# Altium PCB mycam.PcbDoc
Units mm, origin at the board's own origin, x right, y up, seen from the top; angles counter-clockwise.
Board outline 40 x 40 mm, 2 copper layers (Top Layer, Bottom Layer); 59 components, 70 nets, 331 pads, 69 vias.
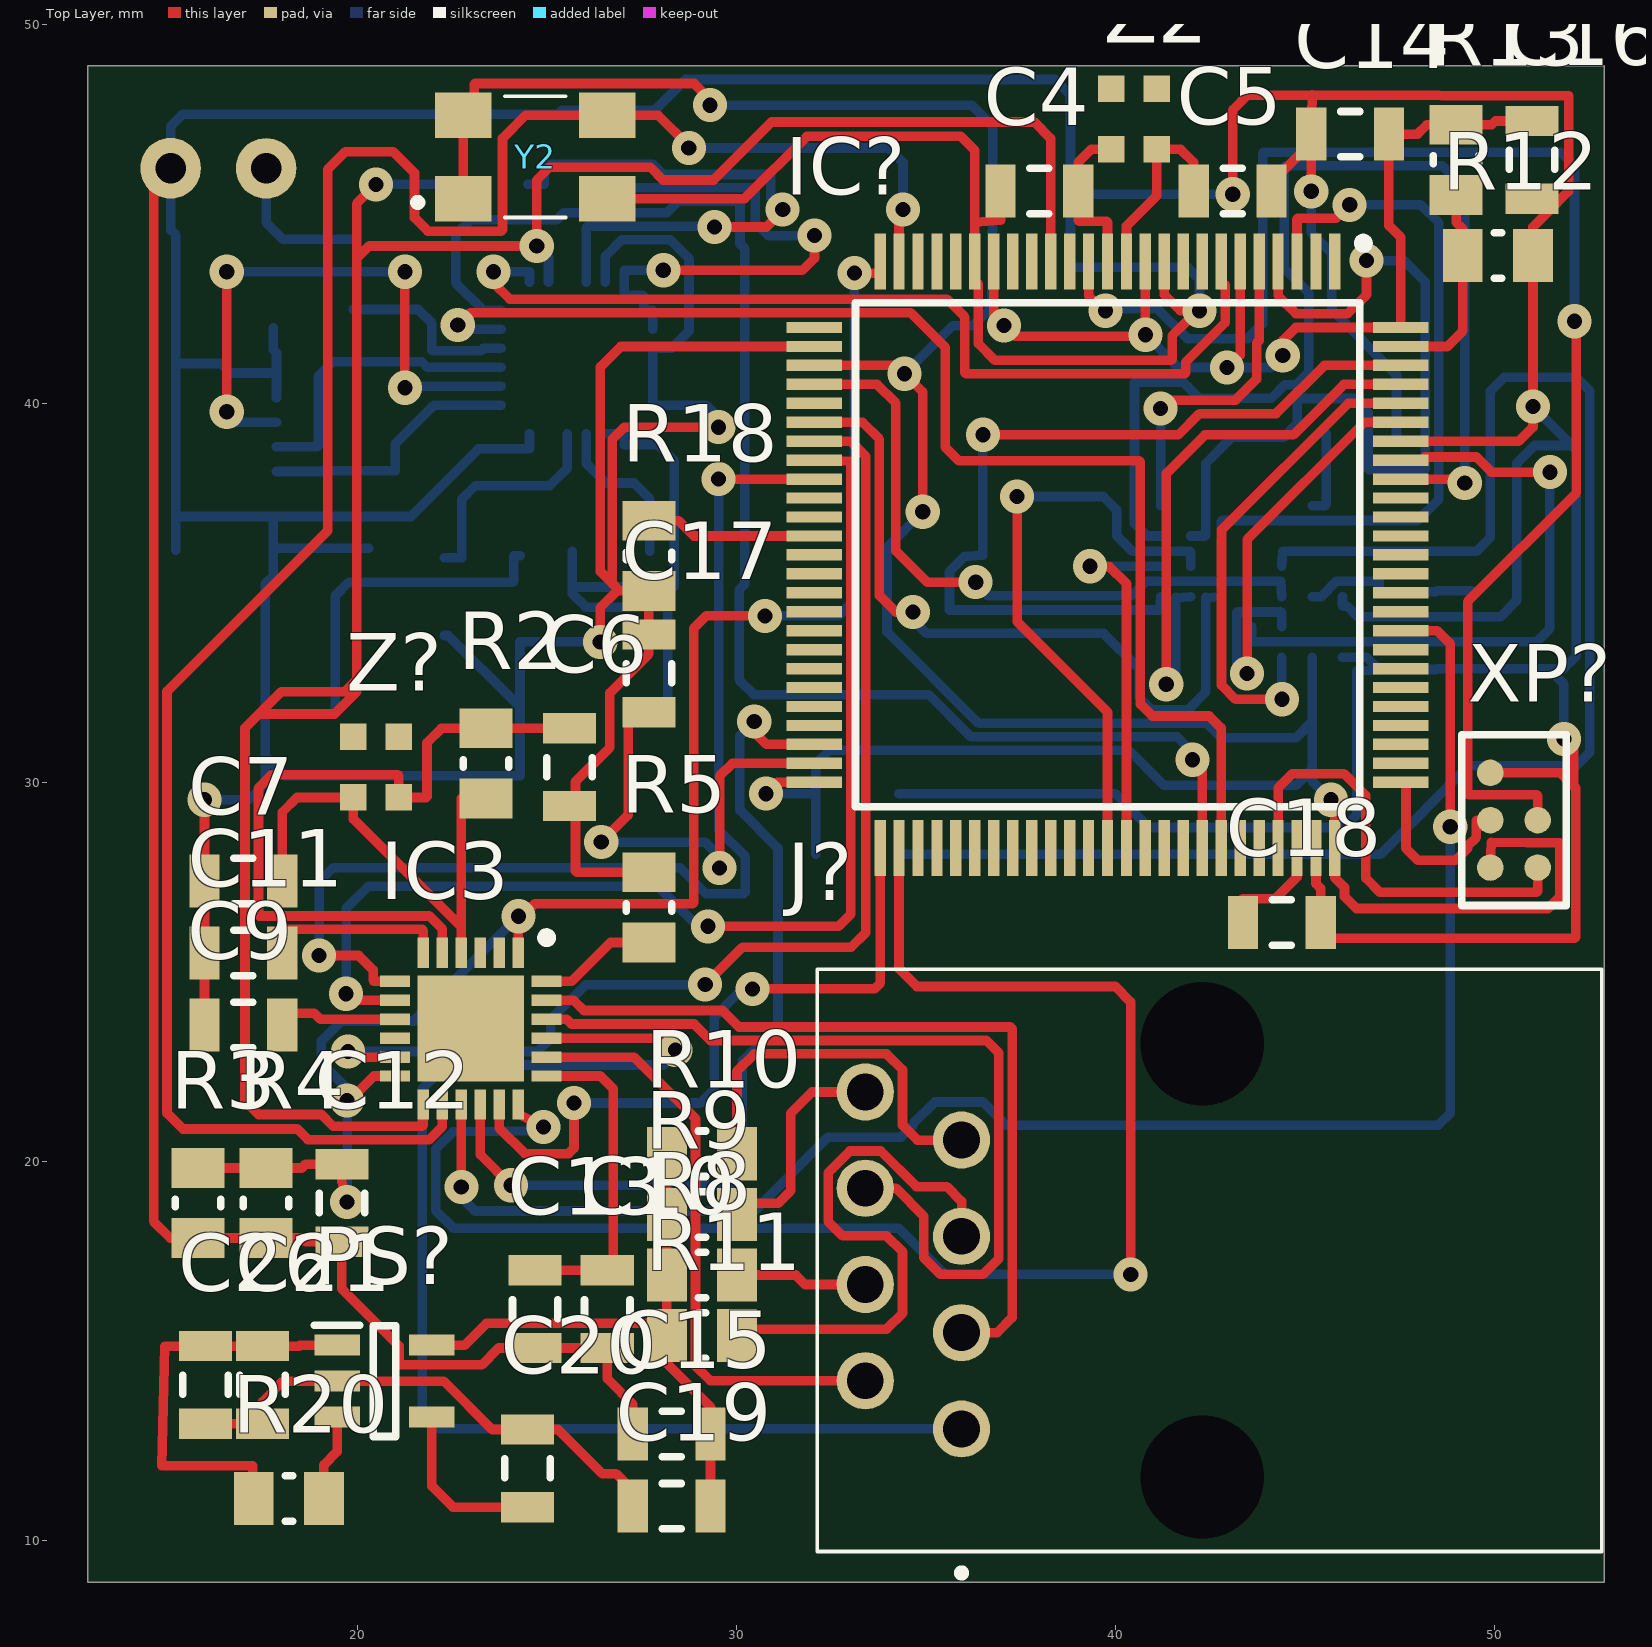
[diagram p0: Top Layer view]
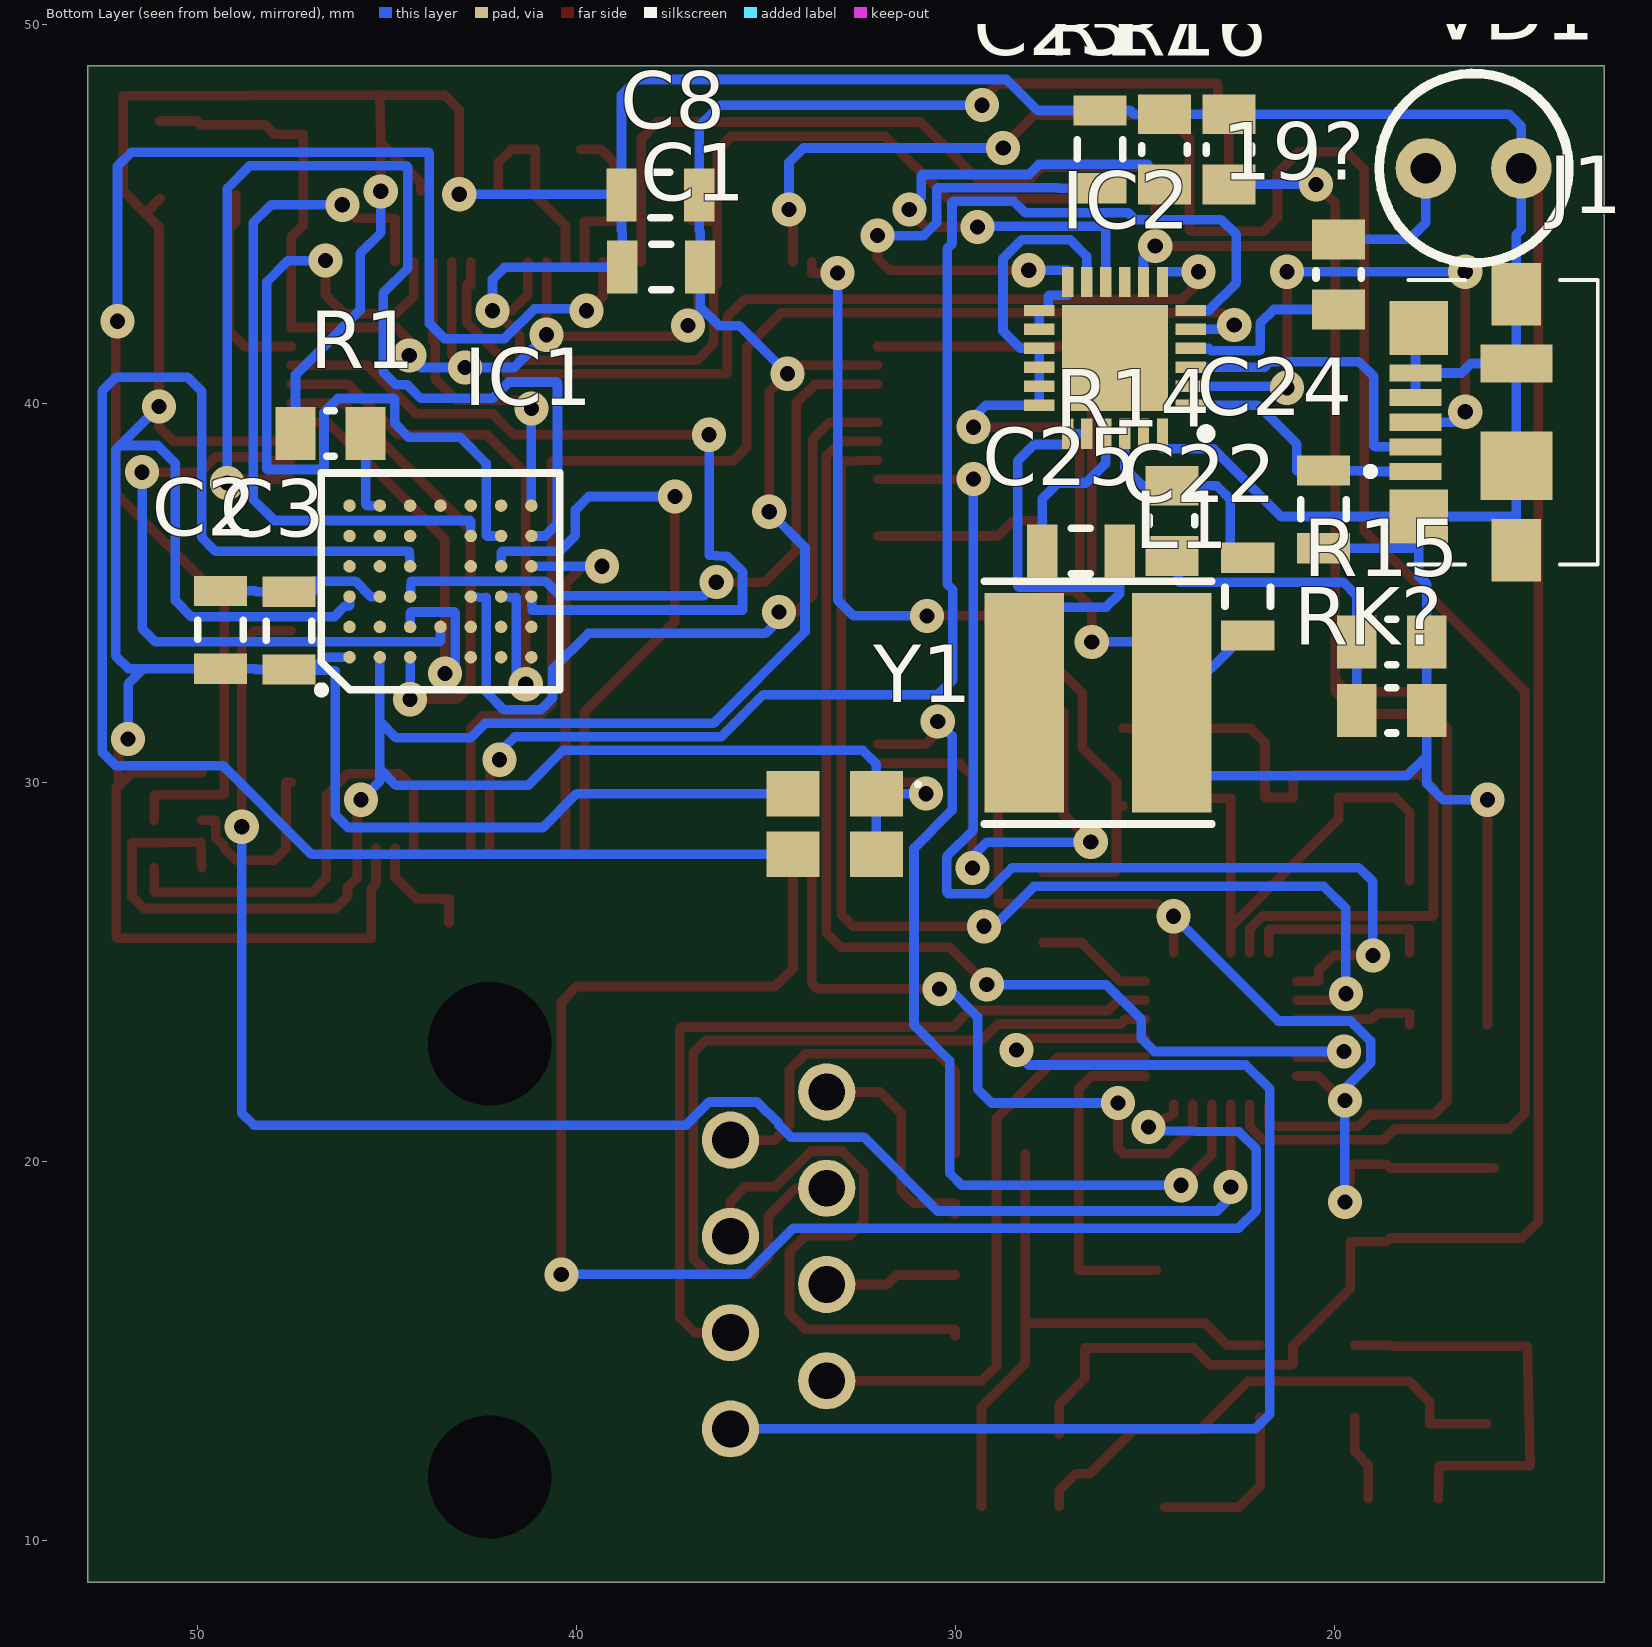
[diagram p1: Bottom Layer view, seen from below]
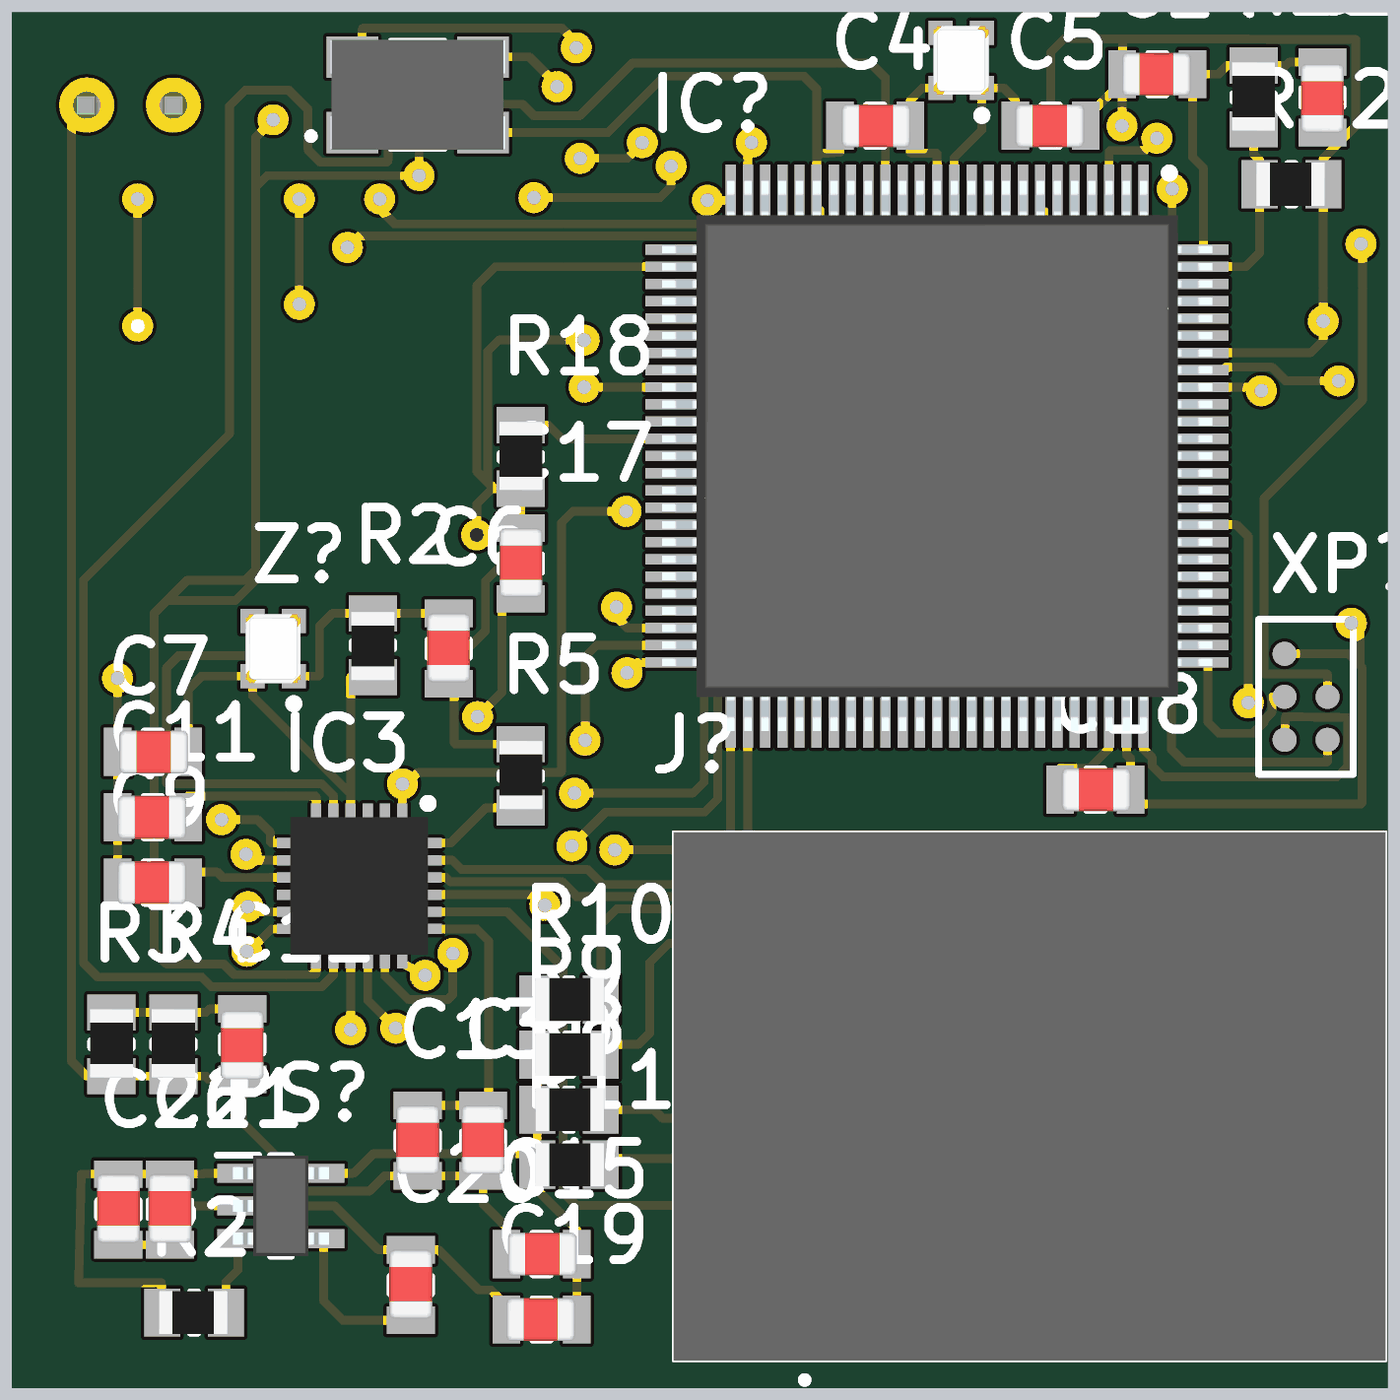
[diagram p2: 3D render of the assembled board from above, using the file's embedded part models]
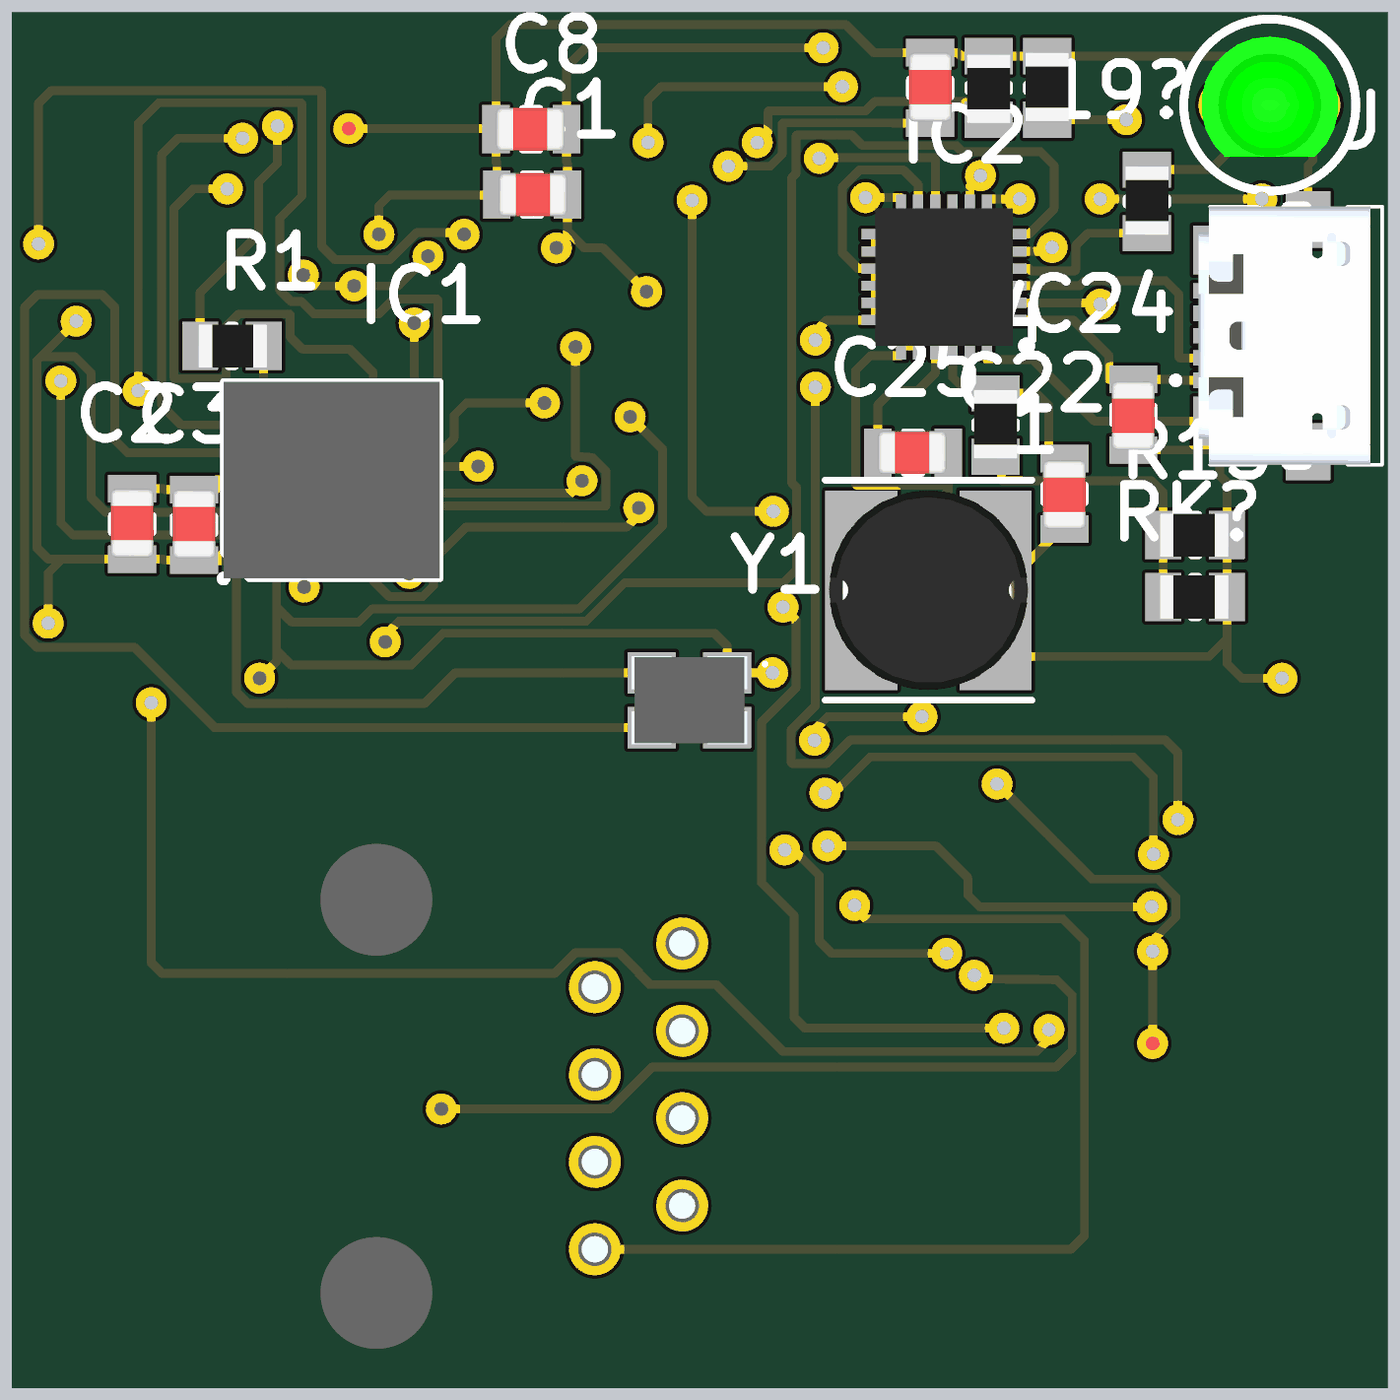
[diagram p3: 3D render of the assembled board from below, using the file's embedded part models]

## Layer stack, top to bottom
Top Solder: solder mask 0.0102, Solder Resist, Dk 3.5
Top Layer: signal copper 0.0356
Dielectric 1: dielectric 0.32, FR-4, Dk 4.8
Bottom Layer: signal copper 0.0356
Bottom Solder: solder mask 0.0102, Solder Resist, Dk 3.5

## Board outline
52.9,8.9 12.9,8.9 12.9,48.9 52.9,48.9

## Design rules (kind name [scope] priority, off if disabled: settings)
Clearance [All] p1: gap=0.1 ignorepadtopadclearanceinfootprint=FALSE
ComponentClearance [All] p1: gap=0.1 collisioncheckmode=3 verticalgap=1 showdistances=FALSE
HoleSize [All] p1: absolutevalues=TRUE maxlimit=3.5 minlimit=0.4 maxpercent=80.000 minpercent=20.000
MinimumSolderMaskSliver [All] p1: minsoldermaskwidth=0.1
PolygonConnect [All] p1: connectstyle=Relief reliefconductorwidth=0.3 reliefentries=4 polygonreliefangle="90 Angle" airgapwidth=0.25
RoutingVias [All] p1: holewidth=0.4 width=0.9 viastyle="Through Hole" minholewidth=0.4 minwidth=0.9 maxholewidth=0.4 maxwidth=0.9
SilkToSolderMaskClearance [IsPad] p1: minsilkscreentomaskgap=0.2 clearancetoexposedcopper=TRUE
SolderMaskExpansion [All] p1: expansion=0.1
Width [All] p1: maxlimit=0.8 minlimit=0.2 preferedwidth=0.254
26 further rules are at their usual default settings.

## Components (designator, comment, footprint, x,y, rotation, side; value= is the part's Value field where it differs from the comment)
19? "" "0805 (Resistor)" 19.9,43.4 r90 bottom
C1 "" "0805 (Capacitor)" 37.775,43.6 r180 bottom
C2 "" "0805 (Capacitor)" 49.4,34.025 r90 bottom
C3 "" "0805 (Capacitor)" 47.6,34 r90 bottom
C4 "" "0805 (Capacitor)" 38,45.6 r0 top
C5 "" "0805 (Capacitor)" 43.1,45.6 r180 top
C6 "" "0805 (Capacitor)" 25.6,30.4 r90 top
C7 "" "0805 (Capacitor)" 17,27.4 r0 top
C8 "" "0805 (Capacitor)" 37.8,45.5 r0 bottom
C9 "" "0805 (Capacitor)" 17,23.6 r180 top
C10 "" "0805 (Capacitor)" 26.6,16.1 r90 top
C11 "" "0805 (Capacitor)" 17,25.5 r180 top
C12 "" "0805 (Capacitor)" 19.6,18.9 r270 top
C13 "" "0805 (Capacitor)" 24.7,16.1 r90 top
C14 "" "0805 (Capacitor)" 46.2,47.1 r180 top
C15 "" "0805 (Capacitor)" 28.3,12.8 r0 top
C16 "" "0805 (Capacitor)" 51,46.425 r270 top
C17 "" "0805 (Capacitor)" 27.7,32.875 r90 top
C18 "" "0805 (Capacitor)" 44.4,26.3 r0 top
C19 "" "0805 (Capacitor)" 28.3,10.9 r180 top
C20 "" "0805 (Capacitor)" 24.5,11.9 r90 top
C21 "" "0805 (Capacitor)" 17.5,14.1 r90 top
C22 "" "0805 (Capacitor)" 22.3,34.9 r270 bottom
C23 "" "0805 (Capacitor)" 26.2,46.7 r90 bottom
C24 "" "0805 (Capacitor)" 20.3,37.2 r270 bottom
C25 "" "0805 (Capacitor)" 26.7,36.1 r0 bottom
C26 "" "0805 (Capacitor)" 16,14.1 r90 top
IC1 "OV9655(2640)" BGA38C80P6X7_572X628X96 43.6,35.3 r90 bottom
IC2 "BQ24295RGER" QFN50P400X400X100-25N-D 25.8,41.2 r0 bottom
IC3 "LAN8720ACP" QFN50P400X400X100-25N-D 23,23.5 r270 top
IC? "STM32F407VGT6" QFP50P1600X1600X160-100N 39.8,36 r270 top
J1 "0473461001" 0473461001 15.9,39.5 r90 bottom
J? "SS-6488-FLS" SS6488FLS 35.95,12.94 r90 top
L1 "Fixed inductor, , , 0603, 50mA, -55...+125°C" "IND: SDR0604" 26.25,32.1 r0 bottom
PS? "AP2202K-ADJTRG1" SOT95P280X145-5N 20.725,14.2 r0 top
R1 "" "0805 (Resistor)" 46.5,39.2 r180 bottom
R2 "" "0805 (Resistor)" 23.4,30.5 r270 top
R3 "" "0805 (Resistor)" 15.8,18.9 r90 top
R4 "" "0805 (Resistor)" 17.6,18.9 r90 top
R5 "" "0805 (Resistor)" 27.7,26.7 r90 top
R8 "" "0805 (Resistor)" 29.1,17 r0 top
R9 "" "0805 (Resistor)" 29.1,18.6 r0 top
R10 "" "0805 (Resistor)" 29.1,20.2 r0 top
R11 "" "0805 (Resistor)" 29.1,15.4 r0 top
R12 "" "0805 (Resistor)" 50.1,43.9 r180 top
R13 "" "0805 (Resistor)" 49,46.425 r90 top
R14 "" "0805 (Resistor)" 24.3,36.9 r90 bottom
R15 "" "0805 (Resistor)" 18.5,33.7 r0 bottom
R16 "" "0805 (Resistor)" 22.8,46.7 r90 bottom
R17 "" "0805 (Resistor)" 24.5,46.7 r270 bottom
R18 "" "0805 (Resistor)" 27.7,35.975 r90 top
R20 "" "0805 (Resistor)" 18.2,11.1 r180 top
RK? "" "0805 (Resistor)" 18.5,31.9 r0 bottom
VD1 "LED, Green, *, *, *, -55...+150°C" LED 18.33,44.202 r180 bottom
XP? "SWD" SWD 50.4,28.5 r90 top
Y1 "403C11A24M00000" 403C11A20M00000 33.2,28.9 r0 bottom
Y2 "405C11A25M00000" 405C11A25M00000 24.7,46.5 r0 top
Z2 "Crystal, , 6pF, ±50ppm, case 2016, -30...+85°C" "OSC: 2016" 40.5,47.5 r90 top
Z? "Crystal, , 6pF, ±50ppm, case 2016, -30...+85°C" "OSC: 2016" 20.5,30.4 r90 top

## Footprints (in the part's own frame and the unit in brackets; to place one, negate y for a bottom-side part, rotate by r counter-clockwise, add the part's x,y. Pads: shape width x height; smd on the part's side, far side on the other; paste and mask are expansions set on the pad)
403C11A20M00000 [mm]
  rect 1.4x1.2 smd: 1(-1.1,-0.8) 2(1.1,-0.8) 3(1.1,0.8) 4(-1.1,0.8)
  silkscreen extent -2.25,-1.1 -2.15,-1, body extent -1.68,-1.28 1.68,1.28, height 0.85
405C11A25M00000 [mm]
  rect 1.5x1.2 smd: 1(-1.9,-1.1) 2(1.9,-1.1) 3(1.9,1.1) 4(-1.9,1.1)
  silkscreen extent -3.2,-1.6 0.8,1.6, body extent -2.53,-1.6 2.53,1.6, height 1.1
"0805 (Capacitor)" [mm] "Chip Capacitor, 2-Leads, Body 2,00x1,25mm, IPC Medium Density"
  rect 0.8x1.4 smd: 1(-1.025,0) 2(1.025,0)
  silkscreen extent -0.25,-0.6 0.25,0.6, body extent -0.97,-0.62 1.03,0.63, height 0.78
"0805 (Resistor)" [mm] "Chip Resistor, 2-Leads, Body 2,10x1,30mm, IPC Medium Density"
  rect 1.05x1.4 smd: 1(-0.925,0) 2(0.925,0)
  silkscreen extent -0.1,-0.6 0.1,0.6, body extent -0.98,-0.63 1.02,0.62, height 0.5
0473461001 [mm]
  rect 0.45x1.38 smd: 1(-1.3,1.975) 2(-0.65,1.975) 3(0,1.975) 4(0.65,1.975) 5(1.3,1.975)
  rect 1.425x1.55 smd: MP1(-2.487,1.89) MP2(2.487,1.89)
  rect 1.65x1.3 smd: MP3(-3.375,-0.685) MP6(3.375,-0.685)
  rect 1.8x1.9 smd: MP4(-1.15,-0.685)
  rect 1x1.9 smd: MP5(1.55,-0.685)
  silkscreen extent -3.75,-2.83 3.75,3.26, body extent -3.9,-2.5 3.9,2.5, height 2.72
BGA38C80P6X7_572X628X96 [mm]
  round 0.33 smd: A1(-2,2.4) A2(-1.2,2.4) A3(-0.4,2.4) A4(0.4,2.4) A5(1.2,2.4) A6(2,2.4) B1(-2,1.6) B2(-1.2,1.6) B3(-0.4,1.6) B4(0.4,1.6) B5(1.2,1.6) B6(2,1.6) C1(-2,0.8) C2(-1.2,0.8) C3(-0.4,0.8) C4(0.4,0.8) C5(1.2,0.8) C6(2,0.8) D2(-1.2,0) D6(2,0) E1(-2,-0.8) E2(-1.2,-0.8) E3(-0.4,-0.8) E4(0.4,-0.8) E5(1.2,-0.8) E6(2,-0.8) F1(-2,-1.6) F2(-1.2,-1.6) F3(-0.4,-1.6) F4(0.4,-1.6) F5(1.2,-1.6) F6(2,-1.6) G1(-2,-2.4) G2(-1.2,-2.4) G3(-0.4,-2.4) G4(0.4,-2.4) G5(1.2,-2.4) G6(2,-2.4)
  silkscreen extent -2.96,-3.14 2.86,3.24, body extent -2.86,-3.14 2.86,3.14, height 0.96
"IND: SDR0604" [mm]
  rect 2.1x5.8 smd: 1(-1.95,0) 2(1.95,0)
  silkscreen extent -3,-3.2 3,3.2, body extent -2.9,-2.9 2.9,2.9, height 4.8
LED [mm]
  round 1.6 hole 0.8: 1(0.73,1.998) 2(3.25,2)
  silkscreen extent -0.5,-0.5 4.5,4.5, body extent 0.01,0.5 3.99,3.99, height 5.38
"OSC: 2016" [mm]
  rect 0.7x0.7 smd: 1(-0.8,-0.6) 2(-0.8,0.6) 3(0.8,0.6) 4(0.8,-0.6)
  round 0.5 on Top Overlay: ""(-1.6,-0.6)
  body extent -1,-0.8 1,0.8, height 0.65
QFN50P400X400X100-25N-D [mm]
  rect 0.8x0.3 smd: 1(-2,1.25) 2(-2,0.75) 3(-2,0.25) 4(-2,-0.25) 5(-2,-0.75) 6(-2,-1.25) 13(2,-1.25) 14(2,-0.75) 15(2,-0.25) 16(2,0.25) 17(2,0.75) 18(2,1.25)
  rect 0.3x0.8 smd: 7(-1.25,-2) 8(-0.75,-2) 9(-0.25,-2) 10(0.25,-2) 11(0.75,-2) 12(1.25,-2) 19(1.25,2) 20(0.75,2) 21(0.25,2) 22(-0.25,2) 23(-0.75,2) 24(-1.25,2)
  rect 2.8x2.8 smd: 25(0,0)
  silkscreen extent -2.52,1.88 -2.27,2.12, body extent -2,-2 2,2, height 1
QFP50P1600X1600X160-100N [mm]
  rect 1.475x0.3 smd: 1(-7.738,6) 2(-7.738,5.5) 3(-7.738,5) 4(-7.738,4.5) 5(-7.738,4) 6(-7.738,3.5) 7(-7.738,3) 8(-7.738,2.5) 9(-7.738,2) 10(-7.738,1.5) 11(-7.738,1) 12(-7.738,0.5) 13(-7.738,0) 14(-7.738,-0.5) 15(-7.738,-1) 16(-7.738,-1.5) 17(-7.738,-2) 18(-7.738,-2.5) 19(-7.738,-3) 20(-7.738,-3.5) 21(-7.738,-4) 22(-7.738,-4.5) 23(-7.738,-5) 24(-7.738,-5.5) 25(-7.738,-6) 51(7.738,-6) 52(7.738,-5.5) 53(7.738,-5) 54(7.738,-4.5) 55(7.738,-4) 56(7.738,-3.5) 57(7.738,-3) 58(7.738,-2.5) 59(7.738,-2) 60(7.738,-1.5) 61(7.738,-1) 62(7.738,-0.5) 63(7.738,0) 64(7.738,0.5) 65(7.738,1) 66(7.738,1.5) 67(7.738,2) 68(7.738,2.5) 69(7.738,3) 70(7.738,3.5) 71(7.738,4) 72(7.738,4.5) 73(7.738,5) 74(7.738,5.5) 75(7.738,6)
  rect 0.3x1.475 smd: 26(-6,-7.738) 27(-5.5,-7.738) 28(-5,-7.738) 29(-4.5,-7.738) 30(-4,-7.738) 31(-3.5,-7.738) 32(-3,-7.738) 33(-2.5,-7.738) 34(-2,-7.738) 35(-1.5,-7.738) 36(-1,-7.738) 37(-0.5,-7.738) 38(0,-7.738) 39(0.5,-7.738) 40(1,-7.738) 41(1.5,-7.738) 42(2,-7.738) 43(2.5,-7.738) 44(3,-7.738) 45(3.5,-7.738) 46(4,-7.738) 47(4.5,-7.738) 48(5,-7.738) 49(5.5,-7.738) 50(6,-7.738) 76(6,7.738) 77(5.5,7.738) 78(5,7.738) 79(4.5,7.738) 80(4,7.738) 81(3.5,7.738) 82(3,7.738) 83(2.5,7.738) 84(2,7.738) 85(1.5,7.738) 86(1,7.738) 87(0.5,7.738) 88(0,7.738) 89(-0.5,7.738) 90(-1,7.738) 91(-1.5,7.738) 92(-2,7.738) 93(-2.5,7.738) 94(-3,7.738) 95(-3.5,7.738) 96(-4,7.738) 97(-4.5,7.738) 98(-5,7.738) 99(-5.5,7.738) 100(-6,7.738)
  silkscreen extent -8.35,-6.65 6.65,6.88, body extent -8,-8 8,8, height 1.6
SOT95P280X145-5N [mm]
  rect 1.2x0.55 smd: 1(-1.25,0.95) 2(-1.25,0) 3(-1.25,-0.95) 4(1.25,-0.95) 5(1.25,0.95)
  silkscreen extent -1.85,-1.46 0.3,1.48, body extent -1.4,-1.46 1.4,1.46, height 1.45
SS6488FLS [mm]
  round 1.509 hole 0.97: 1(0,0) 2(1.27,2.54) 3(2.54,0) 4(3.81,2.54) 5(5.08,0) 6(6.35,2.54) 7(7.62,0) 8(8.89,2.54)
  round 1.625 hole 3.25 unplated: MH1(-1.27,-6.35) MH2(10.16,-6.35)
  silkscreen extent -3.9,-16.89 12.12,3.81, body extent -3.24,-16.89 12.12,3.81, height 11.15
SWD [mm]
  round 0.7 smd: 1(-0.75,0.5) 2(0.5,0.5) 3(1.75,0.5) 4(-0.75,-0.75) 5(0.5,-0.75)
  silkscreen extent -1.75,-1.5 2.75,1.25

## Part data
19? R1 R2 R3 R4 R5 R8 R9 R10 R11 R12 R13 R14 R15 R16 R17 R18 R20: library part Resistor
C1 C2 C3 C4 C5 C6 C7 C8 C9 C10 C11 C12 C13 C14 C15 C16 C17 C18 C19 C20 C21 C22 C23 C24 C25 C26: library part Condensator
IC1: library part OV2640-VL9A, "Integrated Circuit", Manufacturer_Name=Omnivision, Datasheet Link=https://www.uctronics.com/download/cam_module/OV2640DS.pdf, Height=0.965mm, Manufacturer_Part_Number=OV2640-VL9A
IC2: "Integrated Circuit", Manufacturer_Name="Texas Instruments", Mouser Part Number=595-BQ24295RGER, Arrow Part Number=BQ24295RGER, Arrow Price/Stock=https://www.arrow.com/en/products/bq24295rger/texas-instruments, Datasheet Link=http://www.ti.com/lit/ds/symlink/bq24295.pdf, Height=1mm, Manufacturer_Part_Number=BQ24295RGER, Mouser Price/Stock=https://www.mouser.co.uk/ProductDetail/Texas-Instruments/BQ24295RGER?qs=igp4D3uu33JuaPeRfsSg2w%3D%3D
IC3: "Integrated Circuit", Manufacturer_Name=Microchip, Datasheet Link=http://ww1.microchip.com/downloads/en/DeviceDoc/8720a.pdf, Height=1mm, Manufacturer_Part_Number=LAN8720ACP
IC?: "Integrated Circuit", Manufacturer_Name=STMicroelectronics, Mouser Part Number=511-STM32F407VGT6, Arrow Part Number=STM32F407VGT6, Arrow Price/Stock=https://www.arrow.com/en/products/stm32f407vgt6/stmicroelectronics?region=nac, Datasheet Link=http://www.st.com/web/en/resource/technical/document/datasheet/DM00037051.pdf, Height=1.6mm, Manufacturer_Part_Number=STM32F407VGT6, Mouser Price/Stock=https://www.mouser.co.uk/ProductDetail/STMicroelectronics/STM32F407VGT6?qs=Z8%252BeY1k3TIKAEQqwbO%2FOzA%3D%3D
J1: "Connector", Manufacturer_Name=Molex, Mouser Part Number=N/A, Arrow Part Number=0473461001, Arrow Price/Stock=https://www.arrow.com/en/products/0473461001/molex?region=nac, Datasheet Link=https://componentsearchengine.com/Datasheets/1/0473461001.pdf, Height=2.45mm, Manufacturer_Part_Number=0473461001, Mouser Price/Stock=https://www.mouser.co.uk/ProductDetail/Molex/0473461001?qs=2bnkQPT%252BPafTZgGVt%2FOGfA%3D%3D
J?: "Connector", Manufacturer_Name=Bel, Mouser Part Number=530-SS-6488-FLS, Datasheet Link=https://www.mouser.com/datasheet/2/643/dr-STW-SS-6488-FLS-1155125.pdf, Height=11.05mm, Manufacturer_Part_Number=SS-6488-FLS
L1: library part Inductor_0603, Manufacturer="Murata Electronics", MaxCurrent=50mA, Package=0603, PartNumber=LQM18FN100M00D, Temperature=-55...+125°C, TypeInductor="Fixed inductor", HelpURL=https://www.digikey.com/product-detail/en/murata-electronics-north-america/LQM18FN100M00D/490-4025-1-ND/1016285, ValueManufacturerPartNumber="Fixed inductor, , , 0603, 50mA, -55...+125°C"
PS?: "Power Supply", Manufacturer_Name="Diodes Inc.", Mouser Part Number=621-AP2202K-ADJTRG1, Arrow Part Number=AP2202K-ADJTRG1, Arrow Price/Stock=https://www.arrow.com/en/products/ap2202k-adjtrg1/diodes-incorporated, Datasheet Link=https://datasheet.datasheetarchive.com/originals/distributors/Datasheets_SAMA/e861ef6f8b654668a5f87b1391b432c9.pdf, Height=1.45mm, Manufacturer_Part_Number=AP2202K-ADJTRG1, Mouser Price/Stock=https://www.mouser.co.uk/ProductDetail/Diodes-Incorporated/AP2202K-ADJTRG1/?qs=x6A8l6qLYDCHGTWtscGpkA%3D%3D
RK?: library part Resistor_termo
VD1: library part LED_single, ColorParameter=Green, Temperature=-55...+150°C, TypeDiode=LED, ValueManufacturerPartNumber="LED, Green, *, *, *, -55...+150°C"
Y1: "Crystal or Oscillator", Manufacturer_Name=CTS, Mouser Part Number=774-403C11A24M00000, Arrow Part Number=403C11A24M00000, Arrow Price/Stock=https://www.arrow.com/en/products/403c11a24m00000/cts, Datasheet Link=https://datasheet.datasheetarchive.com/originals/dk/DKDS-12/236325.pdf, Height=0.75mm, Manufacturer_Part_Number=403C11A24M00000, Mouser Price/Stock=https://www.mouser.co.uk/ProductDetail/CTS-Electronic-Components/403C11A24M00000?qs=9D%2FjjU8ZSZ6G6K4SP5chGw%3D%3D
Y2: "Crystal or Oscillator", Manufacturer_Name=CTS, Mouser Part Number=774-405C11A25M00000, Arrow Part Number=405C11A25M00000, Arrow Price/Stock=https://www.arrow.com/en/products/405c11a25m00000/cts, Datasheet Link=https://componentsearchengine.com/Datasheets/1/405C11A25M00000.pdf, Height=1mm, Manufacturer_Part_Number=405C11A25M00000, Mouser Price/Stock=https://www.mouser.com/Search/Refine.aspx?Keyword=774-405C11A25M00000
Z2 Z?: library part Crystal_2016, LoadCapacitance=6pF, Manufacturer="Murata Electronics", Package="case 2016", PartNumber=XRCGB25M000F0L00R0, Temperature=-30...+85°C, Tolerance=±50ppm, HelpURL=https://www.digikey.com/product-detail/en/murata-electronics-north-america/XRCGB25M000F0L00R0/490-5577-1-ND/2368391, TypeOscilator=Crystal, ValueManufacturerPartNumber="Crystal, , 6pF, ±50ppm, case 2016, -30...+85°C"

## Via types
v1: diameter 0.9, hole 0.4, Top Layer to Bottom Layer, 69 vias

## Nets (pads, with @x,y where several pads share a name; then routed paths per layer and width w, separated by ;. In a path a pad name is that pad's centre, name@x,y a point inside that pad or via, vN(x,y) a via of type N, cw(c..) or ccw(c..) an arc to the next point about the centre after c; other vN are vias at no path point)
+2.5V: C2.2 C3.2 IC1.B3 | length 4.7
  Bottom Layer w0.254: IC1.B3 45.441,34.9 45.847,35.306 46.965,35.306 46.965,35.025 C3.2 48.463,35.025 48.488,35.05 C2.2
+3.3V: C1.2 C8.1 C14.1 C16.1 IC1.B1 IC?.6 IC?.11 IC?.19 IC?.28 IC?.50 IC?.75 IC?.100 R13.2 XP?.1 Y1.1 Y1.4 Y2.1 Y2.4 | length 111.3
  Top Layer w0.254: Y2.1 Y2.4 23.089,47.6 23.089,48.412 23.114,48.438 28.892,48.438 29.312,48.019 v1(29.312,47.866) ; v1(30.785,29.7) 31.085,30 IC?.50 ; IC?.28 34.226,41 v1(34.447,40.78) 34.925,40.301 v1(34.925,37.139) ; IC?.19 36.8,42.317 v1(37.068,42.05) 37.351,41.766 40.758,41.766 v1(40.8,41.808) IC?.11 ; v1(42.951,40.945) 42.97,40.945 43.3,41.275 IC?.6 ; v1(44.425,41.262) 44.425,41.657 44.767,42 IC?.100 47.538,44.374 47.225,44.687 C14.1 47.981,47.1 48.231,47.35 R13.2 49.936,47.35 50.036,47.45 C16.1 ; v1(45.695,29.54) 45.8,29.435 IC?.75 45.8,27.481 46.052,27.229 46.052,26.987 46.369,26.67 51.422,26.67 51.74,26.987 51.74,28.397 49.925,28.423 XP?.1
  Bottom Layer w0.254: v1(29.312,47.866) 36.216,47.866 36.775,47.307 C8.1 36.775,44.551 36.75,44.526 C1.2 36.75,42.545 ; v1(30.785,29.7) Y1.1 ; Y1.4 Y1.1 ; v1(34.447,40.78) 35.717,42.05 36.255,42.05 36.75,42.545 ; v1(34.925,37.139) 33.981,36.195 33.981,33.972 36.4,31.554 42.428,31.554 42.808,31.175 44.767,31.175 45.2,31.607 ; v1(37.068,42.05) 36.75,42.367 36.75,42.545 ; v1(40.8,41.808) 41.664,40.945 v1(42.951,40.945) 44.107,40.945 v1(44.425,41.262) ; IC1.B1 45.2,31.607 ; v1(45.695,29.54) 45.2,30.035 45.2,30.352 ; Y1.1 32.1,30.48 32.466,30.846 40.365,30.846 41.292,29.92 44.767,29.92 45.2,30.352 ; 45.2,30.352 45.2,31.607
GND: C1.1 C2.1 C3.1 C4.1 C5.1 C6.1 C7.1 C8.2 C9.2 C10.1 C11.2 C12.2 C13.1 C14.2 C15.1 C16.2 C17.2 C18.2 C22.2 C23.2 C24.2 IC1.A1 IC1.A3 IC2.11 IC2.15 IC2.16 IC2.17 IC2.18 IC2.24 IC?.10 IC?.20 IC?.27 IC?.74 IC?.94 J1.4 J1.5 J1.MP1 J1.MP2 J1.MP3 J1.MP4 J1.MP5 J1.MP6 L1.1 R1.1 R3.1 R4.1 R5.2 R12.1 R15.1 R16.2 R17.1 R18.1 RK?.1 VD1.2 XP?.3 Y1.2 Y2.2 | length 313.8
  Top Layer w0.254: VD1.2 14.63,46.202 14.63,18.415 15.07,17.975 R3.1 16.688,17.975 R4.1 18.542,17.975 18.642,17.875 C12.2 19.6,16.633 21.107,15.126 21.107,14.656 21.133,14.63 23.292,14.63 23.736,15.075 C13.1 C10.1 26.6,14.264 27.275,13.589 C15.1 ; C9.2 C11.2 15.975,26.441 C7.1 v1(15.975,29.54) ; C6.1 C6.1@25.764,29.375 ; v1(26.416,33.706) 26.416,34.608 26.858,35.05 26.929,35.05 ; Y2.2 30.227,45.4 31.87,47.043 35.929,47.043 36.3,46.672 36.3,44.78 ; R5.2 25.8,27.625 25.764,27.661 C6.1@25.764,29.375 ; v1(29.54,39.37) 27.054,39.37 26.736,39.052 26.736,35.242 ; IC?.27 26.962,41.5 26.419,40.957 26.419,35.56 26.736,35.242 ; C4.1 36.975,44.831 36.3,44.78 ; IC?.10 41.3,42.862 41.719,42.443 v1(42.227,42.443) 41.974,42.189 41.91,42.189 41.508,41.787 41.508,41.161 41.478,41.131 36.83,41.131 36.391,41.571 36.391,43.155 36.3,43.155 IC?.20 36.3,44.78 ; v1(43.104,45.517) 43.104,47.739 43.497,48.133 45.2,48.128 ; C5.1 44.125,45.822 C14.2@45.175,46.872 ; v1(45.175,45.593) C14.2@45.175,46.872 ; IC?.74 45.3,27.328 45.425,27.203 C18.2 45.425,25.883 52.125,25.883 52.15,25.908 52.15,29.852 52.095,29.907 ; IC?.94 50.655,39 51.025,39.37 v1(51.025,39.92) R12.1 51.025,44.653 C16.2@51.386,45.014 ; XP?.3 51.752,30.25 52.095,29.907 ; C16.2 C16.2@51.386,45.014 ; v1(51.841,31.14) 51.841,31.128 52.095,30.874 52.095,29.907 ; C6.1@25.764,29.375 25.764,30.016 26.67,30.922 26.67,32.36 27.7,33.39 C17.2 R18.1 26.929,35.05 ; 26.736,35.242 26.929,35.05 ; C14.2@45.175,46.872 C14.2 45.2,48.128 ; 45.2,48.128 45.2,48.133 51.968,48.108 ; 45.2,48.128 51.968,48.108 ; C16.2@51.386,45.014 51.968,45.596 51.968,48.108
  Bottom Layer w0.254: J1.MP3 15.215,36.982 ; v1(15.975,29.54) 17.145,29.54 17.575,29.97 17.575,30.698 ; J1.MP2 17.79,41.411 17.875,41.326 J1.5 ; J1.4 J1.5 ; C24.2 17.831,36.175 17.79,36.216 ; C22.2 22.403,33.875 24.178,32.1 L1.1 ; R16.2 23.647,47.625 ; IC2.24 24.55,38.798 23.203,38.798 21.417,37.013 J1.MP1 ; v1(26.416,33.706) 24.3,33.706 L1.1 ; IC2.11 26.55,43.881 26.987,44.318 28.258,44.318 28.757,43.819 28.757,41.91 28.297,41.45 IC2.15 IC2.16 IC2.17 IC2.18 29.21,39.95 29.54,39.62 v1(29.54,39.37) ; Y1.2 40.005,29.7 40.898,28.808 46.038,28.808 46.372,29.142 46.372,32.944 C3.1 ; v1(42.227,42.443) 42.227,43.269 41.91,43.586 38.8,43.586 C1.1 38.8,44.526 38.825,44.551 C8.2 C8.2@38.825,45.517 ; v1(43.104,45.517) C8.2@38.825,45.517 ; v1(45.175,45.593) 45.175,44.5 45.72,43.955 45.72,42.456 47.425,40.751 R1.1 ; IC1.A1 46.634,33.3 46.959,32.975 C3.1 ; IC1.A3 46,34.671 46.025,34.646 46.126,34.646 46.406,34.366 50.165,34.366 50.597,34.798 50.597,38.417 51.067,38.887 52.057,38.887 ; v1(51.025,39.92) 52.057,38.887 ; v1(51.841,31.14) 51.841,32.594 51.435,33 ; 15.215,36.982 15.246,37.013 J1.MP1 ; 15.215,36.982 J1.MP4 J1.MP5 ; J1.MP5 16.408,41.05 16.658,40.8 J1.5 ; J1.MP5 J1.MP6 15.215,44.45 15.08,44.585 VD1.2 15.08,47.307 15.397,47.625 23.648,47.625 ; 17.575,30.698 RK?.1 R15.1 17.575,35.23 17.79,35.445 17.79,36.216 ; 17.575,30.698 18.098,30.175 24.3,30.175 L1.1 ; 17.79,36.216 J1.MP1 ; 23.648,47.625 R17.1 25.298,47.625 25.398,47.725 C23.2 27.846,47.725 28.664,48.543 38.417,48.543 38.825,48.136 C8.2@38.825,45.517 ; C3.1 48.463,32.975 48.488,33 C2.1 51.435,33 ; 51.435,33 51.834,33 52.172,33.337 52.172,38.773 52.057,38.887
Net19?_1: 19?.1 IC2.4 | length 4.8
  Bottom Layer w0.254: 19?.1 21.609,42.475 21.971,42.113 21.971,41.408 21.996,41.383 23.266,41.383 23.334,41.45 IC2.4
Net19?_2: 19?.2 VD1.1 | length 3.9
  Bottom Layer w0.254: VD1.1 17.6,44.767 18.043,44.325 19?.2
NetC4_2: C4.2 IC?.13 Z2.2 | length 4.4
  Top Layer w0.254: IC?.13 39.8,44.78 39.775,44.806 39.05,44.806 39.025,44.831 C4.2 39.025,46.355 39.37,46.7 Z2.2
NetC5_2: C5.2 IC?.12 Z2.1 | length 5.2
  Top Layer w0.254: IC?.12 40.3,44.679 41.1,45.479 Z2.1 41.73,46.7 42.075,46.355 C5.2
NetC6_2: C6.2 IC3.5 R2.1 Z?.1 | length 19.5
  Top Layer w0.254: IC3.5 22.25,26.131 21.907,26.473 17.424,26.473 17.398,26.499 17.398,29.845 17.754,30.201 21.075,30.201 21.1,30.175 Z?.1 21.819,29.6 21.844,29.625 21.844,31.044 22.225,31.425 R2.1 C6.2
NetC7_2: C7.2 IC3.4 R2.2 Z?.2 | length 13.2
  Top Layer w0.254: C7.2 18.025,29.21 18.415,29.6 Z?.2 19.9,29.032 22.75,26.182 ; IC3.4 22.75,26.182 ; R2.2 22.75,29.575 22.75,26.182
NetC9_1: C9.1 IC3.9 | length 3.4
  Top Layer w0.254: C9.1 18.025,23.905 18.873,23.905 19.033,23.745 20.413,23.745 20.413,23.75 IC3.9
NetC10_2: C10.2 C13.2 IC3.19 | length 8.8
  Top Layer w0.254: C13.2 C10.2 26.763,17.125 26.763,21.907 26.42,22.25 IC3.19
NetC11_1: C11.1 IC3.6 | length 4.9
  Top Layer w0.254: C11.1 18.025,26.119 21.717,26.119 21.75,26.086 IC3.6
NetC15_2: C15.2 C19.1 PS?.5 R8.1 R9.1 R10.1 R11.1 | length 16.2
  Top Layer w0.254: PS?.5 22.842,15.15 23.414,15.723 R11.1@28.175,15.723 ; R10.1 28.175,19.38 R9.1 28.175,17.78 R8.1 28.175,16.18 R11.1@28.175,15.723 ; C19.1 29.325,11.836 C15.2 29.325,13.513 28.175,14.663 R11.1 R11.1@28.175,15.723
NetC17_1: C17.1 IC?.49 | length 12.9
  Top Layer w0.254: v1(26.441,28.423) 27.153,29.134 27.153,31.85 C17.1 ; v1(29.566,27.737) 29.566,30.162 29.903,30.5 IC?.49
  Bottom Layer w0.254: v1(26.441,28.423) 29.185,28.423 29.566,28.042 v1(29.566,27.737)
NetC18_1: C18.1 IC?.73 | length 3
  Top Layer w0.254: C18.1 43.375,26.924 44.221,26.924 44.8,27.503 IC?.73
NetC19_2: C19.2 C20.2 C21.1 C26.1 PS?.2 | length 13.7
  Top Layer w0.254: C26.1 16.739,13.075 C21.1 17.5,13.652 18.048,14.2 PS?.2 22.287,14.2 23.562,12.925 C20.2 25.302,12.925 26.467,11.76 26.826,11.76 27.275,11.311 C19.2
NetC20_1: C20.1 PS?.4 | length 4.6
  Top Layer w0.254: PS?.4 21.971,13.25 21.971,11.43 22.526,10.875 C20.1
NetC21_2: C21.2 C26.2 PS?.1 R20.2 | length 11
  Top Layer w0.254: R20.2 17.25,11.963 14.846,11.963 14.922,15.125 C26.2 16.739,15.125 C21.2 18.466,15.125 18.491,15.15 PS?.1
NetC22_1: C22.1 IC2.22 R14.2 | length 6
  Bottom Layer w0.254: C22.1 22.758,35.925 22.758,37.465 23.118,37.825 R14.2 25.082,37.825 25.55,38.292 IC2.22
NetC23_1: C23.1 IC2.12 IC2.13 IC2.14 | length 15
  Top Layer w0.254: v1(28.08,43.51) 31.75,43.51 32.067,43.828 v1(32.067,44.425)
  Bottom Layer w0.254: C23.1 27.28,45.675 27.289,45.684 30.48,45.684 30.505,45.659 30.505,44.767 30.848,44.425 v1(32.067,44.425) ; IC2.14 IC2.13 27.559,42.45 27.559,42.824 27.534,42.85 27.05,42.85 IC2.12 27.05,43.51 v1(28.08,43.51)
NetC24_1: C24.1 IC2.1 J1.1 | length 7.1
  Bottom Layer w0.254: J1.1 19.05,38.2 19.075,38.225 C24.1 21.006,38.225 21.006,38.922 22.034,39.95 IC2.1
NetC25_1: C25.1 IC2.19 IC2.20 L1.2 | length 14.6
  Bottom Layer w0.254: C25.1 25.675,35.179 ; IC2.20 IC2.19 27.05,38.913 27.94,38.913 28.372,38.481 28.372,35.179 28.346,35.154 25.7,35.154 25.675,35.179 ; L1.2 28.2,34.62 26.035,34.62 25.675,34.98 25.675,35.179
NetC25_2: C25.2 IC2.21 | length 4.2
  Bottom Layer w0.254: IC2.21 26.05,38.417 26.571,37.897 27.305,37.897 27.725,37.477 C25.2
NetIC1_B6: IC1.B6 R1.2 | length 2.3
  Bottom Layer w0.254: IC1.B6 45.542,37.3 45.575,37.333 R1.2
NetIC1_C4: IC1.C4 Y1.3 | length 41.7
  Bottom Layer w0.254: Y1.3 46.998,28.1 49.338,30.44 52.17,30.44 52.527,30.797 52.527,40.322 52.159,40.691 50.271,40.691 49.902,40.322 49.902,36.466 49.53,36.093 44.425,36.093 IC1.C4
NetIC2_2: IC2.2 J1.3 | length 15.6
  Top Layer w0.254: v1(16.561,39.776) v1(16.561,43.472) ; v1(21.26,40.411) v1(21.26,43.472)
  Bottom Layer w0.254: v1(16.561,39.776) 16.586,39.5 J1.3 ; v1(16.561,43.472) v1(21.26,43.472) ; v1(21.26,40.411) 21.298,40.45 IC2.2
NetIC2_3: IC2.3 J1.2 | length 8
  Bottom Layer w0.254: J1.2 18.948,38.85 18.974,38.875 18.974,40.702 19.367,41.096 21.706,41.096 21.852,40.95 IC2.3
NetIC2_10: IC2.10 R17.2 | length 14.9
  Top Layer w0.254: v1(29.426,44.653) 30.797,44.653 31.229,45.085 v1(31.229,45.11)
  Bottom Layer w0.254: R17.2 24.943,45.775 24.943,46.304 27.807,46.304 28.073,46.038 30.886,46.038 30.912,46.013 30.912,45.428 v1(31.229,45.11) ; IC2.10 26.05,44.636 26.086,44.672 29.407,44.672 v1(29.426,44.653)
NetIC3_20: IC3.20 J?.2 | length 15.8
  Top Layer w0.254: IC3.20 27.305,22.75 28.931,21.124 28.931,14.605 29.326,14.21 J?.2
NetIC3_21: IC3.21 J?.1 | length 33.6
  Top Layer w0.254: IC3.21 28.083,23.25 v1(28.397,22.936)
  Bottom Layer w0.254: v1(28.397,22.936) 28.397,22.86 28.08,22.543 22.352,22.543 21.717,21.907 21.717,13.335 22.112,12.94 J?.1
NetIC3_22: IC3.22 J?.6 | length 23
  Top Layer w0.254: IC3.22 25.526,23.75 25.654,23.622 28.892,23.622 29.326,23.189 36.603,23.189 36.931,22.86 36.931,17.437 36.512,17.018 35.395,17.018 34.95,17.462 34.95,18.555 34.215,19.29 J?.6
NetIC3_23: IC3.23 J?.3 | length 21.7
  Top Layer w0.254: IC3.23 25.712,24.25 25.984,23.978 29.642,23.978 30.077,23.543 37.238,23.543 37.286,23.495 37.286,15.875 36.891,15.48 J?.3
NetIC3_24: IC3.24 R5.1 | length 3.1
  Top Layer w0.254: IC3.24 25.661,24.75 26.686,25.775 R5.1
NetIC?_37: IC?.37 R18.2 | length 4.5
  Top Layer w0.254: R18.2 28.488,36.9 28.888,36.5 IC?.37
NetIC?_99: IC?.99 R12.2 R13.1 | length 5.5
  Top Layer w0.254: IC?.99 48.765,41.5 49.175,41.91 R12.2 49.175,44.602 49,44.777 R13.1
NetJ?_4: J?.4 R8.2 | length 3.5
  Top Layer w0.254: R8.2 31.572,17 31.822,16.75 J?.4
NetJ?_5: J?.5 R11.2 | length 15.1
  Top Layer w0.254: R11.2 30.025,15.57 33.972,15.57 34.392,15.989 34.392,17.615 33.972,18.034 32.809,18.034 32.428,18.415 32.428,19.697 33.003,20.271 33.817,20.271 34.755,19.333 35.56,19.333 35.95,18.943 J?.5
NetJ?_7: J?.7 R10.2 | length 10.1
  Top Layer w0.254: R10.2 30.025,22.38 30.48,22.835 33.972,22.835 34.392,22.415 34.392,20.955 34.787,20.56 J?.7
NetJ?_8: J?.8 R9.2 | length 6.1
  Top Layer w0.254: R9.2 30.025,18.898 31.115,18.898 31.445,19.228 31.445,21.273 32.003,21.83 J?.8
NetPS?_3: PS?.3 R20.1 | length 2.3
  Top Layer w0.254: R20.1 19.125,11.989 19.475,12.339 PS?.3
NetR14_1: R14.1 R15.2 RK?.2 | length 8.7
  Bottom Layer w0.254: RK?.2 19.425,32.791 R15.2 19.425,34.925 19.781,35.281 24.105,35.281 24.13,35.306 24.13,35.975 R14.1
NRST: IC?.14 XP?.5 | length 39.3
  Top Layer w0.254: IC?.14 39.3,42.831 39.688,42.443 v1(39.751,42.443) ; XP?.5 51.15,29.642 51.125,29.667 49.327,29.667 49.301,29.693 49.301,34.769 52.172,37.639 52.172,42.113 v1(52.121,42.164)
  Bottom Layer w0.254: v1(39.751,42.443) 39.802,42.494 41.123,42.494 41.91,41.707 43.497,41.707 43.891,42.1 43.891,46.599 43.917,46.624 51.752,46.624 52.121,46.256 v1(52.121,42.164)
PA1: IC3.14 IC?.24 Y2.3 | length 57.8
  Top Layer w0.254: IC3.14 22.25,20.914 21.907,20.572 18.705,20.572 18.423,20.853 15.405,20.853 14.986,21.273 14.986,32.4 19.228,36.642 19.228,46.177 19.685,46.634 20.955,46.634 21.514,46.076 21.514,44.897 21.87,44.541 23.802,44.541 23.838,44.577 23.838,46.99 24.447,47.6 Y2.3 27.94,47.6 28.753,46.787 v1(28.753,46.736) ; IC?.24 34.3,45.009 v1(34.404,45.113)
  Bottom Layer w0.254: v1(28.753,46.736) 34.023,46.736 34.404,46.355 v1(34.404,45.113)
PA2: C12.1 IC3.1 IC3.12 IC?.25 R3.2 R4.2 | length 44.7
  Top Layer w0.254: R3.2 16.688,19.825 R4.2 18.542,19.825 18.642,19.925 C12.1 19.6,19.456 v1(19.736,18.923) ; v1(19.736,21.603) 19.8,21.603 20.447,22.25 IC3.12 ; IC3.1 v1@24.25,26.352 ; v1(24.257,26.467) v1@24.25,26.352 ; v1(30.759,34.392) 29.21,34.392 28.88,34.061 28.88,26.822 28.854,26.797 24.694,26.797 v1@24.25,26.352 ; v1(33.122,43.434) 33.8,43.434 IC?.25
  Bottom Layer w0.254: v1(19.736,18.923) v1(19.736,21.603) 19.736,21.92 19.059,22.597 19.059,23.177 19.584,23.703 21.493,23.703 v1(24.257,26.467) ; v1(30.759,34.392) 32.703,34.392 33.122,34.811 v1(33.122,43.434)
PA4: IC1.C3 IC?.29 | length 17.5
  Top Layer w0.254: IC?.29 33.719,40.5 34.214,40.005 34.214,36.106 35.039,35.281 v1(36.322,35.281)
  Bottom Layer w0.254: v1(36.322,35.281) 36.322,35.242 36.639,34.925 40.45,34.925 40.831,35.306 44.375,35.306 IC1.C3
PA6: IC1.E3 IC?.31 | length 19.6
  Top Layer w0.254: IC?.31 33.337,39.5 33.782,39.056 33.782,34.925 34.214,34.493 v1(34.671,34.493)
  Bottom Layer w0.254: v1(34.671,34.493) 34.671,34.29 35.029,33.932 39.699,33.932 40.64,32.991 40.64,32.229 40.957,31.911 41.919,31.911 42.393,32.385 42.393,34.875 IC1.E3
PA7: IC3.11 IC?.32 | length 30.6
  Top Layer w0.254: v1(19.761,22.898) 19.909,22.75 IC3.11 ; v1(29.185,24.663) 30.172,25.651 33.039,25.651 33.423,26.035 33.423,38.597 33.02,39 IC?.32
  Bottom Layer w0.254: v1(19.761,22.898) 24.765,22.898 25.108,23.241 25.108,23.736 26.035,24.663 v1(29.185,24.663)
PA9: IC2.6 IC?.68 | length 38.8
  Top Layer w0.254: v1(42.043,30.597) 42.3,30.34 IC?.68
  Bottom Layer w0.254: IC2.6 23.332,42.45 22.602,43.18 22.602,44.45 23,44.848 25.272,44.848 25.451,45.026 28.169,45.026 28.473,45.33 30.074,45.33 30.103,45.301 30.103,44.206 30.23,44.079 30.23,35.228 30.082,35.081 30.082,32.703 30.473,32.312 35.083,32.312 36.195,31.2 41.641,31.2 42.043,30.797 v1(42.043,30.597)
PA10: IC2.5 IC?.69 | length 34.5
  Top Layer w0.254: v1(22.657,42.062) 22.987,42.393 34.608,42.393 35.522,41.478 35.522,38.837 35.877,38.481 40.64,38.481 40.665,38.456 40.665,32.067 40.983,31.75 42.483,31.75 42.8,31.432 IC?.69
  Bottom Layer w0.254: v1(22.657,42.062) 22.769,41.95 IC2.5
PA13: IC?.72 XP?.4 | length 11.8
  Top Layer w0.254: IC?.72 44.3,29.845 44.682,30.227 46.038,30.227 46.613,29.651 46.613,27.474 46.99,27.098 51.12,27.098 51.15,27.127 XP?.4
PA14: IC?.76 XP?.2 | length 5
  Top Layer w0.254: IC?.76 47.676,30 47.676,28.258 47.993,27.94 48.984,27.94 49.301,28.258 49.301,28.321 49.53,28.55 49.53,28.987 49.543,29 XP?.2
PB6: IC1.G5 IC?.92 | length 29.8
  Top Layer w0.254: IC?.92 49.122,38 v1(49.225,37.897)
  Bottom Layer w0.254: IC1.G5 40.843,36.5 40.513,36.83 40.513,40.538 40.538,40.564 41.796,40.564 42.227,40.132 44.12,40.132 44.475,40.488 44.767,40.488 45.11,40.831 45.11,42.914 44.463,43.561 44.463,46.233 44.501,46.27 48.624,46.27 49.225,45.669 v1(49.225,37.897)
PB7: IC1.D2 IC?.93 | length 16.7
  Top Layer w0.254: IC?.93 48.176,38.5 48.176,38.582 49.53,38.582 49.93,38.183 v1(51.473,38.183)
  Bottom Layer w0.254: IC1.D2 43.6,33.731 43.625,33.706 51.117,33.706 51.473,34.061 v1(51.473,38.183)
PB8: IC1.C2 IC?.95 | length 12.2
  Top Layer w0.254: v1(43.485,32.868) 43.485,36.401 46.584,39.5 IC?.95
  Bottom Layer w0.254: v1(43.485,32.868) 43.205,33.147 43.205,34.468 43.231,34.493 44.375,34.493 44.4,34.468 IC1.C2
PB9: IC1.C1 IC?.96 | length 13.1
  Top Layer w0.254: v1(44.4,32.191) 43.18,32.191 42.808,32.563 42.808,36.656 46.152,40 IC?.96
  Bottom Layer w0.254: v1(44.4,32.191) IC1.C1
PB11: IC3.16 IC?.48 | length 23.6
  Top Layer w0.254: IC3.16 23.25,20.178 v1(24.06,19.367) ; v1(30.48,31.608) 30.48,31.318 30.797,31 IC?.48
  Bottom Layer w0.254: v1(24.06,19.367) 29.845,19.367 30.162,19.685 30.162,22.653 31.106,23.597 31.106,28.258 30.098,29.266 30.098,31.226 v1(30.48,31.608)
PB12: IC3.17 IC?.51 | length 18.2
  Top Layer w0.254: IC3.17 23.75,20.879 24.425,20.203 25.578,20.203 25.723,20.349 v1(25.723,21.539) ; v1(30.429,24.549) 33.655,24.549 33.8,24.694 IC?.51
  Bottom Layer w0.254: v1(25.723,21.539) 29.058,21.539 29.426,21.907 29.426,23.812 30.162,24.549 v1(30.429,24.549)
PB13: IC3.18 IC?.52 | length 41.6
  Top Layer w0.254: IC3.18 24.25,21.26 v1(24.917,20.904) ; IC?.52 34.3,25.082 34.77,24.613 40.005,24.613 40.411,24.206 v1(40.411,17.018)
  Bottom Layer w0.254: v1(24.917,20.904) 24.917,20.803 22.53,20.777 22.073,20.32 22.073,18.707 22.543,18.237 34.29,18.237 35.509,17.018 v1(40.411,17.018)
PC1: IC2.8 IC3.13 IC?.16 R16.1 | length 63.8
  Top Layer w0.254: v1(20.498,45.775) 19.99,45.267 19.99,43.819 ; IC?.16 38.3,46.99 37.868,47.422 30.937,47.422 29.408,45.893 28.073,45.893 27.738,46.228 25.082,46.228 24.74,45.885 v1(24.74,44.149) 20.32,44.149 19.99,43.819 ; 17.412,31.801 17.997,32.385 19.672,32.385 19.99,32.703 ; 17.412,31.801 19.406,31.801 19.99,32.385 19.99,32.703 ; 17.412,31.801 17.044,31.432 17.044,21.59 17.4,21.234 19.059,21.234 19.367,20.926 21.721,20.926 ; 19.99,32.703 19.99,43.819 ; 21.721,20.926 21.75,20.955 IC3.13 21.721,20.926
  Bottom Layer w0.254: v1(20.498,45.775) R16.1 ; v1(24.74,44.149) 25.05,43.839 IC2.8
PC4: IC3.8 IC?.33 | length 30.6
  Top Layer w0.254: v1(19.71,24.422) 19.883,24.25 IC3.8 ; v1(29.261,26.2) 32.703,26.2 33.028,26.526 33.028,38.466 IC?.33
  Bottom Layer w0.254: v1(19.71,24.422) 19.71,26.67 20.295,27.254 27.942,27.254 28.996,26.2 v1(29.261,26.2)
PC5: IC3.7 IC?.34 | length 29.8
  Top Layer w0.254: v1(18.999,25.429) 20.041,25.429 20.422,25.048 20.422,24.775 20.447,24.75 IC3.7 ; v1(29.54,38) IC?.34
  Bottom Layer w0.254: v1(18.999,25.429) 18.999,27.377 19.367,27.746 28.524,27.746 29.21,27.06 30.201,27.06 30.243,27.102 30.243,28.037 29.54,28.74 v1(29.54,38)
PC6: IC1.F4 IC?.63 | length 16.2
  Top Layer w0.254: v1(37.414,37.541) 37.414,34.239 39.8,31.853 IC?.63
  Bottom Layer w0.254: v1(37.414,37.541) 39.688,37.541 40.043,37.186 40.043,36.512 40.462,36.093 41.975,36.093 42,36.068 IC1.F4
PC7: IC1.G4 IC?.64 | length 10
  Top Layer w0.254: v1(39.341,35.7) 39.842,35.7 40.3,35.242 IC?.64
  Bottom Layer w0.254: v1(39.341,35.7) IC1.G4
PC13: IC2.7 IC?.7 | length 25.1
  Top Layer w0.254: v1(23.597,43.472) 23.597,43.18 24.028,42.748 35.56,42.748 36.037,42.272 36.037,40.809 36.068,40.777 41.834,40.777 41.862,40.805 41.862,41.083 42.905,42.126 42.905,43.12 42.8,43.12 IC?.7
  Bottom Layer w0.254: v1(23.597,43.472) 24.55,43.472 IC2.7
PD3: IC3.15 IC?.84 | length 44.1
  Top Layer w0.254: v1(22.75,19.325) IC3.15 ; IC?.84 48.499,34 48.844,33.655 v1(48.844,28.827)
  Bottom Layer w0.254: v1(22.75,19.325) 22.75,19.05 23.109,18.69 30.48,18.69 32.427,20.637 34.353,20.637 34.671,20.955 34.671,20.993 35.242,21.565 36.512,21.565 37.122,20.955 48.527,20.955 48.844,21.273 v1(48.844,28.827)
PE0: IC1.F3 IC?.97 | length 15.5
  Top Layer w0.254: v1(41.351,32.588) 41.351,38.151 42.367,39.167 44.704,39.167 46.038,40.5 IC?.97
  Bottom Layer w0.254: v1(41.351,32.588) 41.605,32.842 41.605,34.875 IC1.F3
PE1: IC1.G3 IC?.98 | length 22.9
  Top Layer w0.254: v1(36.512,39.171) 41.67,39.171 42.227,39.728 44.249,39.728 45.521,41 IC?.98
  Bottom Layer w0.254: v1(36.512,39.171) 36.512,35.992 36.03,35.958 35.632,35.56 35.632,34.546 41.173,34.546 IC1.G3
PE4: IC1.E5 IC?.3 | length 18.9
  Top Layer w0.254: IC?.3 44.8,44.856 44.826,44.882 45.835,44.882 v1(46.19,45.237)
  Bottom Layer w0.254: IC1.E5 42.8,36.881 42.825,36.906 47.981,36.906 48.539,37.465 48.539,44.767 48.069,45.237 v1(46.19,45.237)
PE5: IC1.F5 IC?.4 | length 22.1
  Top Layer w0.254: IC?.4 44.3,42.835 44.767,42.367 46.139,42.367 46.634,42.862 v1(46.634,43.764)
  Bottom Layer w0.254: IC1.F5 42.367,36.5 42.393,36.525 42.393,38.417 43.082,39.107 44.45,39.107 44.806,39.463 44.806,40.102 44.831,40.127 46.304,40.127 46.672,39.759 46.672,38.278 46.698,38.252 48.158,38.252 48.184,38.278 48.184,43.205 47.625,43.764 v1(46.634,43.764)
PE6: IC1.G6 IC?.5 | length 8.5
  Top Layer w0.254: v1(41.2,39.865) 41.417,40.082 43.18,40.082 43.735,40.637 43.735,41.591 43.8,41.656 IC?.5
  Bottom Layer w0.254: IC1.G6 v1(41.2,39.865)
pads on no net: IC1.A2 IC1.A4 IC1.A5 IC1.A6 IC1.B2 IC1.B4 IC1.B5 IC1.C5 IC1.C6 IC1.D6 IC1.E1 IC1.E2 IC1.E4 IC1.E6 IC1.F1 IC1.F2 IC1.F6 IC1.G1 IC1.G2 IC2.9 IC2.23 IC2.25 IC3.2 IC3.3 IC3.10 IC3.25 IC?.1 IC?.2 IC?.8 IC?.9 IC?.15 IC?.17 IC?.18 IC?.21 IC?.22 IC?.23 IC?.26 IC?.30 IC?.35 IC?.36 IC?.38 IC?.39 IC?.40 IC?.41 IC?.42 IC?.43 IC?.44 IC?.45 IC?.46 IC?.47 IC?.53 IC?.54 IC?.55 IC?.56 IC?.57 IC?.58 IC?.59 IC?.60 IC?.61 IC?.62 IC?.65 IC?.66 IC?.67 IC?.70 IC?.71 IC?.77 IC?.78 IC?.79 IC?.80 IC?.81 IC?.82 IC?.83 IC?.85 IC?.86 IC?.87 IC?.88 IC?.89 IC?.90 IC?.91 J?.MH1 J?.MH2 Z2. Z2.3 Z2.4 Z?. Z?.3 Z?.4